# Altium PCB mchf_pro_ui.PcbDoc (part 6 of 7)
Units mil, origin at the board's own origin, x right, y up, seen from the top; angles counter-clockwise.
Board outline 7877.73 x 5661.04 mil, 2 copper layers (Top Layer, Bottom Layer); 345 components, 345 nets, 1318 pads, 783 vias.
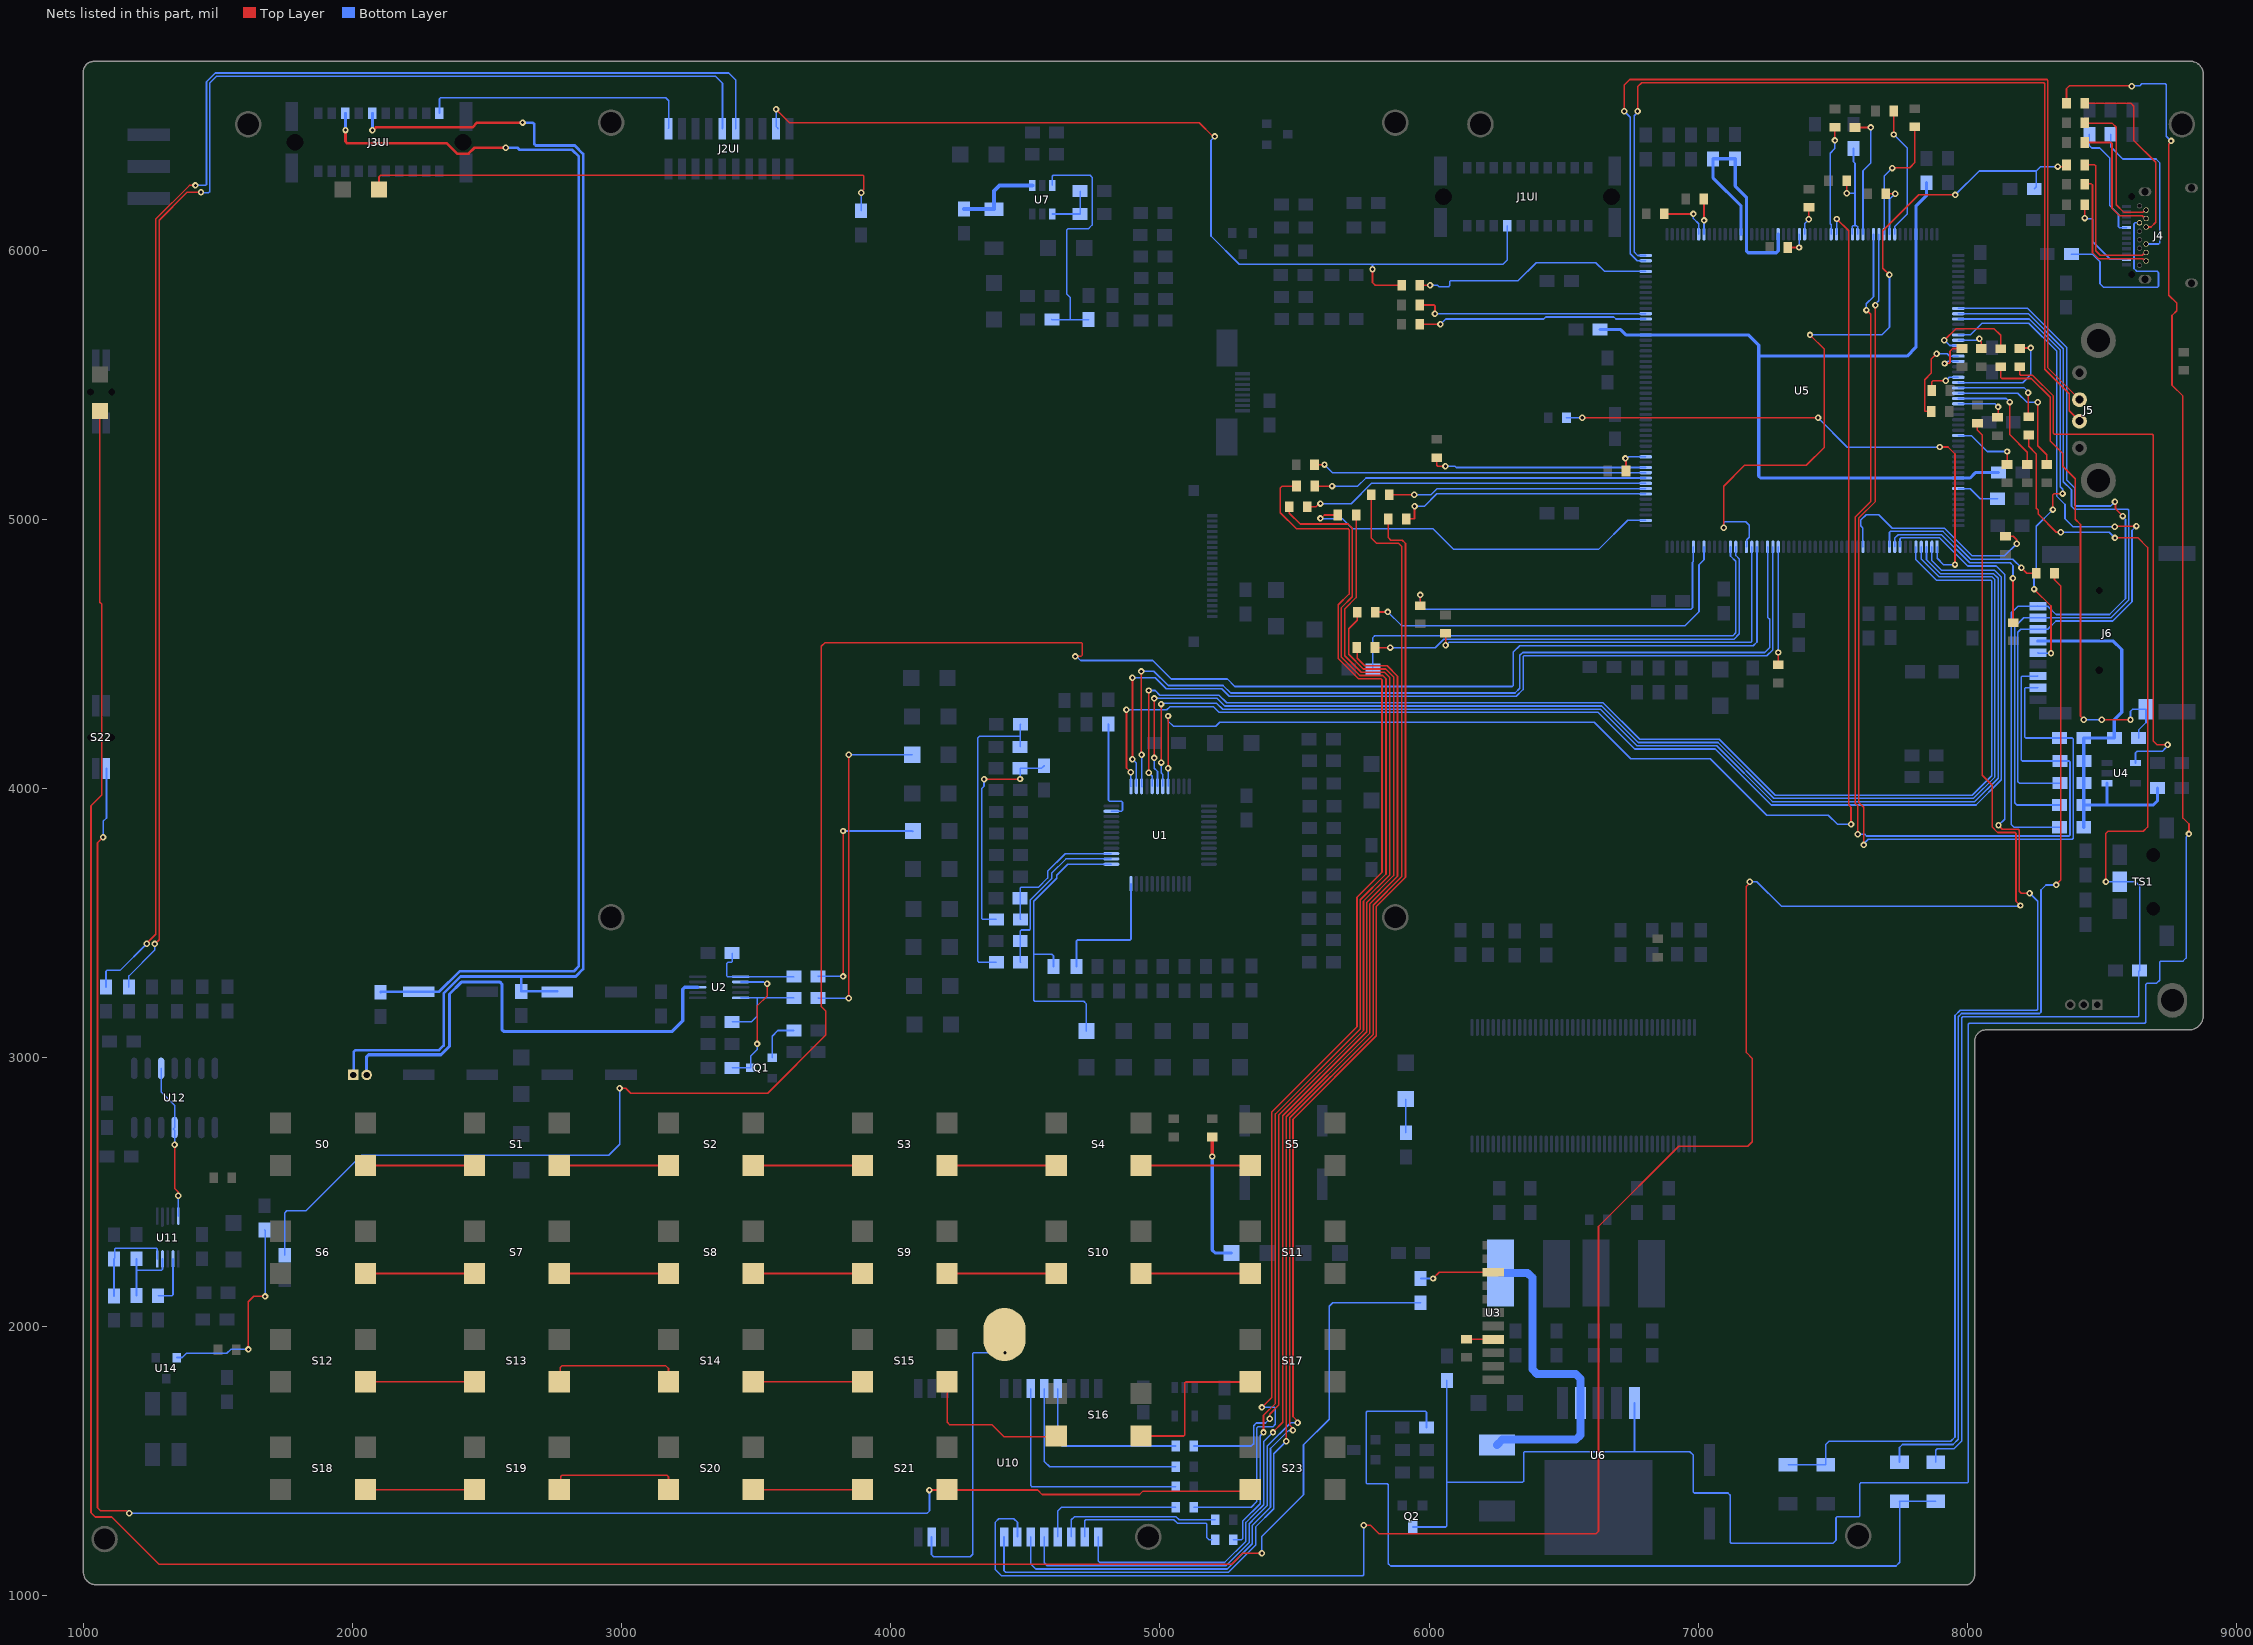
[diagram p5: the nets of this part, all layers, seen from the top]

## Via types
v1: diameter 24, hole 12, Top Layer to Bottom Layer, 779 vias
v2: diameter 30, hole 15, Top Layer to Bottom Layer, 4 vias

## Nets (pads, with @x,y where several pads share a name; then routed paths per layer and width w, separated by ;. In a path a pad name is that pad's centre, name@x,y a point inside that pad or via, vN(x,y) a via of type N, cw(c..) or ccw(c..) an arc to the next point about the centre after c; other vN are vias at no path point) (continued)
NetCC24_2: CC24.2 U1.24 | length 505.9
  Bottom Layer w6: CC24.2@4690.02,3338.63 4690.02,3433.79 4693.54,3437.3 4888.99,3437.3 4892.5,3440.82 U1.24@4892.5,3646.13
NetCC25_1: CC25.1 R2.2 U1.25 | length 1138.8
  Bottom Layer w6: R2.2@4604.6,3338.68 4604.6,3378.41 4598.2,3384.8 4530.85,3384.8 ; CC25.1@4726.82,3099.3 4726.82,3199.9 4717.08,3209.64 4534.36,3209.64 4530.85,3213.15 4530.85,3384.8 ; U1.25@4819.67,3718.97 4657.16,3718.97 4616.43,3678.23 4616.43,3667.31 4530.85,3581.73 4530.85,3384.8
NetCC26_1: CC26.1 CC26a.2 U1.26 | length 642.1
  Bottom Layer w6: CC26a.2@4482.19,3354.58 4480.63,3356.13 CC26.1@4480.63,3433.42 4480.63,3470.89 4484.15,3474.41 4515.17,3474.41 4518.69,3477.92 4518.69,3586.54 4550.01,3617.86 4598.39,3666.25 4598.39,3686.04 4651,3738.65 U1.26@4819.67,3738.65
NetCC26a_1: CC26a.1 R3.2 R5.1 | length 1144
  Bottom Layer w6: CC26a.1@4392.19,3354.58 4327.26,3354.58 4323.75,3358.1 4323.75,4188.72 4329.44,4194.41 4480.47,4194.41 ; R5.1@4480.47,4155.12 4480.47,4194.41 ; R3.2@4481.87,4238.9 4480.47,4237.51 4480.47,4194.41
NetCC27_1: CC27.1 CC27a.2 U1.27 | length 524.2
  Bottom Layer w6: CC27a.2@4482.19,3513.88 4480.47,3515.59 CC27.1@4480.47,3592.46 4480.47,3629.91 4483.99,3633.43 4548.6,3633.43 4582.57,3667.4 4582.57,3693.04 4647.86,3758.34 4654.88,3758.34 U1.27@4819.67,3758.34
NetCC27a_1: CC27a.1 R4.2 R6.1 | length 844.7
  Top Layer w6: v1(4346.36,4034.88) 4346.7,4035.21 4480.14,4035.21 v1(4480.47,4035.55)
  Bottom Layer w6: v1(4346.36,4034.88) 4346.36,4008.99 4338.49,4001.12 4338.49,3517.39 4342.01,3513.88 CC27a.1@4392.19,3513.88 ; v1(4480.47,4035.55) R6.1@4480.47,4075.45 4560.18,4075.45 R4.2@4569.89,4085.16 R4.2@4570.64,4084.41
NetCP89_2: CP89.2 CP152.2 CP199.2 U5.89 U5.152 U5.199 | length 3226.9
  Bottom Layer w12: CP89.2@6635.47,5705.29 6711.58,5705.29 6731.26,5685.61 U5.89@6805.08,5685.61 7186.13,5685.61 7224.55,5647.19 7224.55,5606.87 ; CP152.2@7847.95,6250.96 7847.95,6202.8 7809.02,6163.88 U5.152@7809.02,6059.62 7809.02,5639.77 7776.12,5606.87 7224.55,5606.87 ; CP199.2@8115.66,5174.02 8029.94,5174.02 8010.04,5154.11 U5.199@7966.5,5154.11 7231.58,5154.11 7224.55,5161.14 7224.55,5606.87
NetCP119_1: CP119.1 CP119E.1 U5.119 U5.120 U5.126 | length 949
  Bottom Layer w12: U5.119@7159.42,6059.62 7159.42,6164.55 7055.41,6268.56 CP119E.1@7055.41,6339.04 7056.26,6339.89 CP119.1@7137.28,6339.89 7137.28,6238.7 7179.1,6196.88 U5.120@7179.1,6059.62 7179.1,5998.24 7186.13,5991.21 7290.18,5991.21 7297.21,5998.24 U5.126@7297.21,6059.62
NetCP140_1: CP140.1 M48.2 U5.140 U5.141 | length 445.7
  Top Layer w6: v1(7551.56,6211.95) M48.2@7551.56,6258.47
  Bottom Layer w6: v1(7551.56,6211.95) 7582.42,6211.95 ; U5.140@7572.8,6059.62 7572.8,6088.27 7576.32,6091.78 7582.42,6091.78 ; CP140.1@7577.08,6378.31 7577.08,6328.6 7582.42,6323.26 7582.42,6211.95 ; U5.141@7592.49,6059.62 7592.49,6087.82 7588.52,6091.78 7582.42,6091.78 ; 7582.42,6091.78 7582.42,6211.95
NetD6_2: D6.2 D7.2 U5.8 | length 4805.5
  Top Layer w6: v1(8115.77,3863.36) 8130.12,3849.01 8189.44,3849.01 8192.96,3845.49 8192.96,3618.66 8200.52,3611.09 v1(8231.33,3611.09)
  Bottom Layer w6: D6.2@7334.14,1487.06 D7.2@7473.63,1487.06 7473.63,1562.77 7485.66,1574.8 7938.3,1574.8 7954.05,1590.55 7954.05,3141.52 7954.05,3157.17 7973.2,3176.32 8257.99,3176.32 8261.5,3179.84 8261.5,3581.87 8232.28,3611.09 v1(8231.33,3611.09) ; U5.8@7749.97,4898.21 7749.97,4927.98 7753.48,4931.5 7896.73,4931.5 8001.29,4826.93 8107.02,4826.93 8138.53,4795.42 8138.53,3886.12 v1(8115.77,3863.36)
NetD8_2: D8.2 L1.1 U6.2 | length 1193.3
  Bottom Layer w30: D8.2@6252.37,1561.18 6271.85,1580.66 6544.9,1580.66 6562.47,1598.24 6562.47,1807.23 6544.9,1824.8 6401.44,1824.8 6383.86,1842.38 6383.86,2182.67 6366.29,2200.25 L1.1@6265.8,2200.25
NetD9_2: D9.2 D10.2 R37.1 | length 3196.6
  Bottom Layer w6: R37.1@5990.57,1625.29 5990.57,1682.45 5987.06,1685.96 5770.18,1685.96 5766.67,1682.45 5766.67,1420.02 5770.18,1416.51 5844.64,1416.51 5848.16,1412.99 5848.16,1119.98 5856.92,1111.22 7735.24,1111.22 7749.02,1125 7749.02,1351.12 D10.2@7747.78,1352.36 D9.2@7882.49,1352.36
NetD11_1: D11.1 RFC6.2 U7.1 | length 329.6
  Bottom Layer w15: RFC6.2@4271.65,6153.41 D11.1@4383.71,6153.41 4383.71,6220.45 4404.53,6241.27 U7.1@4525.59,6241.27
NetJ4_A5: J4.A5 R22.2 | length 436.3
  Bottom Layer w6: R22.2@8453.58,6430.81 8453.58,6388.46 8462.04,6380 8492.48,6380 8529.38,6343.1 8529.38,6166.54 8561.79,6134.13 8561.79,6087.96 8565.31,6084.45 J4.A5@8591.18,6084.45
NetJ4_A11: J4.A11 M3.1 | length 316.7
  Top Layer w6: v1(8436.12,6119.95) M3.1@8436.11,6169.58
  Bottom Layer w6: v1(8436.12,6119.95) 8438.15,6117.92 8462.04,6117.92 8465.55,6114.41 8465.55,6031.88 8531.09,5966.34 J4.A11@8591.18,5966.34
NetJ4_B2: J4.B2 M3e.2 | length 492.3
  Top Layer w6: M3e.2@8437.61,6246.77 8461.11,6246.77 8464.9,6242.98 8464.9,5991.94 8487.7,5969.13 8651.81,5969.13 8660.51,5960.44 J4.B2@8664.21,5960.44
NetJ4_B3: J4.B3 M3d.1 | length 556.7
  Top Layer w6: M3d.1@8436.11,6317.26 8473.39,6317.26 8476.9,6313.75 8476.9,5998.17 8493.94,5981.13 8649.71,5981.13 8660.51,5991.94 J4.B3@8664.21,5991.94
NetJ4_B5: J4.B5 R23.1 | length 604.7
  Bottom Layer w6: R23.1@8532.42,6431.56 8532.42,6384.44 8577.67,6339.19 8701.12,6339.19 8715.55,6324.75 8715.55,6028.52 8710.47,6023.43 J4.B5@8664.21,6023.43
NetJ4_B8: J4.B8 M3h.2 | length 693.8
  Top Layer w6: M3h.2@8437.61,6546.25 8607.89,6546.25 8618.83,6535.31 8618.83,6408.2 8700.04,6326.99 8700.04,6104.09 8682.37,6086.43 J4.B8@8664.21,6086.43
NetJ4_B9: J4.B9 R23a.1 | length 759.1
  Bottom Layer w6: R23a.1@8386.96,5986.02 8463.74,5986.02 8492.74,5957.03 8492.74,5876.13 8505.47,5863.39 8706.95,5863.39 8710.47,5866.91 8710.47,5917.07 8705.71,5921.83 8629.88,5921.83 8619.21,5932.49 8619.21,6098.66 8622.73,6102.17 J4.B9@8639.72,6102.17
NetJ4_B10: J4.B10 M3a.1 | length 486.3
  Top Layer w6: M3a.1@8436.11,6400.77 8533.89,6400.77 8537.4,6397.26 8537.4,6156.51 8565.17,6128.75 8649.68,6128.75 8660.51,6117.92 J4.B10@8664.21,6117.92
NetJ4_B11: J4.B11 M3b.1 | length 538.2
  Top Layer w6: M3b.1@8436.11,6474.41 8437.86,6472.66 8537.4,6472.66 8553.15,6456.91 8553.15,6169.58 8581.98,6140.75 8651.83,6140.75 8660.49,6149.41 J4.B11@8664.19,6149.41
NetLD1_1: LD1.1 R19.2 | length 9927.9
  Top Layer w6: LD1.1@1061.02,5403.54 1061.02,4692.75 1068.84,4684.93 1068.84,3976.54 1028.2,3935.9 1028.2,1309.11 1044.03,1293.28 1105.61,1293.28 1280.83,1118.06 5266.68,1118.06 5307.11,1158.49 v1(5378.94,1158.49)
  Bottom Layer w6: v1(5378.94,1158.49) 5378.94,1221.46 5533.46,1375.98 5533.46,1561.59 5628.94,1657.06 5628.94,2076.65 5642,2089.71 R19.2@5968.58,2089.71
NetLD2_1: LD2.1 R30.2 | length 1984.3
  Top Layer w6: LD2.1@2098.43,6226.38 2098.43,6273.22 2104.55,6279.34 3895.62,6279.34 3899.14,6275.82 3899.14,6226.1 3889.76,6216.72 v1(3889.76,6213.58)
  Bottom Layer w6: R30.2@3889.76,6146.96 v1(3889.76,6213.58)
NetLD6_1: LD6.1 R35a.1 | length 125
  Bottom Layer w6: R35a.1@5913.61,2721.32 LD6.1@5913.61,2846.33
"NetLora Ant_1": "LORA ANT.1" U10.21 | length 1092.1
  Bottom Layer w6: U10.21@4151.38,1219.49 4151.38,1154.11 4159.82,1145.67 4294.94,1145.67 4304.13,1154.86 4304.13,1900.03 4307.65,1903.54 v1(4424.21,1903.54)
NetM2_2: M2.2 R19a.1 | length 496.3
  Top Layer w12: v1(5194.22,2632.93) 5194.22,2704.98 M2.2@5194.67,2705.42
  Bottom Layer w12: v1(5194.22,2632.93) 5194.22,2285.05 5204.91,2274.36 R19a.1@5265.53,2274.36
NetM2a_2: M2a.2 U3.8 | length 99.8
  Top Layer w6: M2a.2@6138.78,1954.03 6237.31,1954.03 U3.8@6238.19,1953.15
NetM51a_2: M51a.2 U10.6 | length 901.1
  Bottom Layer w6: U10.6@4520.67,1770.67 4520.67,1409.12 4524.18,1405.61 M51a.2@5058.77,1405.61
NetM51b_2: M51b.2 U10.7 | length 767.2
  Bottom Layer w6: U10.7@4570.67,1770.67 4570.67,1499.83 4590.67,1479.83 M51b.2@5058.77,1479.83
NetM51c_1: M51c.1 U10.13 | length 593.3
  Bottom Layer w6: U10.13@4720.67,1219.49 4720.67,1279.31 4724.18,1282.82 5051.86,1282.82 5063.88,1270.8 5169.96,1270.8 5173.47,1267.29 5173.47,1217.66 5182.42,1208.71 M51c.1@5192.91,1208.71
NetM51d_1: M51d.1 U10.8 | length 642.6
  Bottom Layer w6: U10.8@4620.67,1770.67 4620.67,1572.52 4636.1,1557.09 M51d.1@5058.77,1557.09
NetM51e_1: M51e.1 U10.15 | length 540.4
  Bottom Layer w6: U10.15@4620.67,1219.49 4620.67,1316.01 4634.62,1329.96 M51e.1@5058.77,1329.96
NetM51f_1: M51f.1 U10.14 | length 607.5
  Bottom Layer w6: U10.14@4670.67,1219.49 4670.67,1282.82 4682.67,1294.82 5059.79,1294.82 5071.79,1282.82 M51f.1@5204.91,1282.82
NetM60_2: M60.2 U14.2 | length 774.3
  Top Layer w6: v1(1612.99,1916.14) 1612.99,2093.31 1632.87,2113.19 v1(1675.2,2113.19)
  Bottom Layer w6: U14.2@1346.4,1885.57 1346.83,1885.99 1367.64,1885.99 1383.16,1901.51 1532.46,1901.51 1547.09,1916.14 v1(1612.99,1916.14) ; M60.2@1673.23,2359.8 1675.2,2357.83 v1(1675.2,2113.19)
NetP0_2: P0.2 U2.8 | length 1839
  Bottom Layer w12: P0.2@2052.16,2936.03 2052.16,3003.8 2059.19,3010.83 2328.69,3010.83 2360.24,3042.37 2360.24,3236.67 2404.48,3280.91 2548.06,3280.91 2555.09,3273.88 2555.09,3104.62 2562.12,3097.59 3188.27,3097.59 3227.29,3136.61 3227.29,3254.78 3234.32,3261.81 U2.8@3282.48,3261.81
NetQ1_1: Q1.1 R8.1 | length 168.5
  Bottom Layer w6: Q1.1@3559.05,3000.74 3559.05,3079.72 3580.24,3100.91 R8.1@3639.76,3100.91
NetQ1_3: Q1.3 R9.2 U2.2 | length 508.5
  Top Layer w6: v1(3503.18,3051.39) 3503.18,3191.83 3540.42,3229.06 3540.42,3274.54 v1(3540.35,3274.61)
  Bottom Layer w6: R9.2@3410.43,2962.15 Q1.3@3480.31,2962.15 3480.31,3006.89 3503.18,3029.76 v1(3503.18,3051.39) ; U2.2@3441.93,3281.5 3528.59,3281.5 3535.48,3274.61 v1(3540.35,3274.61)
NetR1_2: R1.2 U1.35 | length 412.1
  Bottom Layer w6: R1.2@4807.94,4240.3 4808.91,4239.33 4808.91,3956.42 4812.43,3952.91 4857.47,3952.91 4860.98,3949.39 4860.98,3919.33 4857.47,3915.82 U1.35@4819.67,3915.82
NetR11_1: R11.1 R13.2 U2.1 | length 350.3
  Bottom Layer w6: R13.2@3410.43,3388.47 3410.43,3357.75 3406.92,3354.23 3395.06,3354.23 3389.76,3348.93 3389.76,3305.44 3394.03,3301.18 U2.1@3441.93,3301.18 3503.18,3301.18 R11.1@3639.76,3301.18
NetR12_1: R12.1 R14.2 U2.5 | length 367.5
  Bottom Layer w6: R14.2@3410.43,3133.22 3482.17,3133.22 3503.18,3154.24 3503.18,3222.44 ; U2.5@3441.93,3222.44 3503.18,3222.44 ; R12.1@3639.76,3222.44 3503.18,3222.44
NetR19_1: R19.1 U3.3 | length 279.4
  Top Layer w6: v1(6014.76,2179.71) 6038.2,2203.15 U3.3@6238.19,2203.15 U3.3@6238.19,2203.15
  Bottom Layer w6: R19.1@5968.58,2179.71 v1(6014.76,2179.71)
NetR33_2: R33.2 U5.201 | length 161.3
  Bottom Layer w6: U5.201@7966.5,5114.74 7967.16,5114.08 8010.69,5114.08 8047.77,5077 R33.2@8112.16,5077
NetR42_2: R42.2 R43.2 U7.4 | length 188
  Bottom Layer w6: U7.4@4600.39,6134.97 R42.2@4703.31,6134.97 R43.2@4703.31,6220.11
NetR44_2: R44.2 R45.1 U7.3 | length 939.5
  Bottom Layer w6: R45.1@4598.44,5743.24 4599.07,5742.62 4666.73,5742.62 ; U7.3@4600.39,6241.27 4600.39,6275.15 4603.91,6278.67 4741.22,6278.67 4747.89,6272 4747.89,6093.76 4733.59,6079.46 4657.82,6079.46 4654.3,6075.94 4654.3,5837.07 4666.73,5824.64 4666.73,5742.62 ; R44.2@4734.39,5742.62 4666.73,5742.62
NetR50_1: R50.1 U11.2 | length 189.7
  Bottom Layer w6: R50.1@1277.8,2115.75 1329.58,2115.75 1333.09,2119.26 U11.2@1333.09,2252.19
NetR51_1: R51.1 R53.1 U11.4 | length 272.7
  Bottom Layer w6: R51.1@1197.33,2116.6 1197.33,2210.58 ; R53.1@1197.55,2253.23 1197.33,2253 1197.33,2210.58 ; U11.4@1293.72,2252.19 1293.72,2214.1 1290.21,2210.58 1197.33,2210.58
NetR52_1: R52.1 R54.1 U11.5 | length 371.8
  Bottom Layer w6: R52.1@1113.64,2114.6 1113.86,2114.82 R54.1@1113.86,2252.17 1115.86,2254.17 1115.86,2288.31 1119.38,2291.82 1270.52,2291.82 1274.04,2288.31 U11.5@1274.04,2252.19
NetR59_1: R59.1 U5.35 | length 8155.2
  Top Layer w6: v1(2992.13,2886.81) 3014.76,2886.81 3033.28,2868.3 3542.76,2868.3 3758.79,3084.33 3758.79,3173.3 3741.76,3190.32 3741.76,4528.46 3755.49,4542.19 4708.47,4542.19 4711.99,4538.67 4711.99,4496.71 4706.46,4491.19 v1(4685.09,4491.19)
  Bottom Layer w6: R59.1@1748.03,2266.18 1748.03,2423.23 1755.91,2431.1 1827.17,2431.1 2033.56,2637.49 2952.22,2637.49 2993.29,2678.55 2993.29,2885.65 v1(2992.13,2886.81) ; v1(4685.09,4491.19) 4689.96,4491.19 4705.15,4476 4973.49,4476 5042.47,4407.02 5250.7,4407.02 5278.47,4379.25 6309.73,4379.25 6313.24,4382.76 6313.24,4507.64 6336.69,4531.09 7204.85,4531.09 7218.47,4544.71 U5.35@7218.47,4898.21
NetS0_4: S0.4 S1.2 | length 405.7
  Top Layer w6: S0.4@2047.64,2599.37 S1.2@2453.35,2599.37
NetS1_4: S1.4 S2.2 | length 405.5
  Top Layer w6: S1.4@2768.31,2599.37 S2.2@3173.82,2599.37
NetS2_4: S2.4 S3.2 | length 405.5
  Top Layer w6: S2.4@3488.78,2599.37 S3.2@3894.29,2599.37
NetS3_4: S3.4 S4.2 | length 405.5
  Top Layer w6: S3.4@4209.25,2599.37 S4.2@4614.76,2599.37
NetS4_4: S4.4 S5.2 | length 405.5
  Top Layer w6: S4.4@4929.72,2599.37 S5.2@5335.24,2599.37
NetS6_4: S6.4 S7.2 | length 405.7
  Top Layer w6: S6.4@2047.64,2198.03 S7.2@2453.35,2198.03
NetS7_4: S7.4 S8.2 | length 405.5
  Top Layer w6: S7.4@2768.31,2198.03 S8.2@3173.82,2198.03
NetS8_4: S8.4 S9.2 | length 405.5
  Top Layer w6: S8.4@3488.78,2198.03 S9.2@3894.29,2198.03
NetS9_4: S9.4 S10.2 | length 405.5
  Top Layer w6: S9.4@4209.25,2198.03 S10.2@4614.76,2198.03
NetS10_4: S10.4 S11.2 | length 405.5
  Top Layer w6: S10.4@4929.72,2198.03 S11.2@5335.24,2198.03
NetS12_4: S12.4 S13.2 | length 405.7
  Top Layer w6: S12.4@2047.64,1796.06 S13.2@2453.35,1796.06
NetS13_4: S13.4 S14.2 | length 512.8
  Top Layer w6: S13.4@2768.31,1796.06 2772,1799.76 2772,1849 2779,1856 3163,1856 3173.82,1845.18 S14.2@3173.82,1796.06
NetS14_4: S14.4 S15.2 | length 405.5
  Top Layer w6: S14.4@3488.78,1796.06 S15.2@3894.29,1796.06
NetS15_4: S15.4 S16.2 | length 569.8
  Top Layer w6: S15.4@4209.25,1796.06 4209.25,1645.75 4218.09,1636.91 4375.09,1636.91 4420.46,1591.54 S16.2@4606.3,1591.54
NetS16_4: S16.4 S17.2 | length 602.5
  Top Layer w6: S16.4@4929.72,1594.49 5088.45,1594.49 5091.96,1598 5091.96,1791.76 5095.48,1795.28 5334.45,1795.28 S17.2@5335.24,1796.06
NetS18_4: S18.4 S19.2 | length 405.7
  Top Layer w6: S18.4@2047.64,1395.08 S19.2@2453.35,1395.08
NetS19_4: S19.4 S20.2 | length 503.1
  Top Layer w6: S19.4@2768.31,1395.08 2774,1400.77 2774,1444.49 2777.51,1448 3169,1448 3173.82,1443.18 S20.2@3173.82,1395.08
NetS20_4: S20.4 S21.2 | length 405.5
  Top Layer w6: S20.4@3488.78,1395.08 S21.2@3894.29,1395.08
NetS21_4: S21.4 S22.4 S23.2 | length 7149.7
  Top Layer w6: v1(1073.19,3819.35) 1052.2,3798.36 1052.2,1327.36 1062.24,1317.32 1160.21,1317.32 v1(1170.37,1307.16) ; v1(4143.7,1393.7) 4207.87,1393.7 S21.4@4209.25,1395.08 4210.57,1393.76 4545.47,1393.76 4562.13,1377.1 4924.17,1377.1 4936.83,1389.76 5329.92,1389.76 S23.2@5335.24,1395.08
  Bottom Layer w6: v1(1073.19,3819.35) 1073.19,3878.4 1085.63,3890.84 S22.4@1085.63,4074.96 ; v1(1170.37,1307.16) 4134.84,1307.16 4143.7,1316.01 v1(4143.7,1393.7)
NetU11_10: U11.10 U12.3 U12.11 | length 579.8
  Top Layer w6: v1(1338.72,2676.18) 1338.72,2514.48 1352.37,2500.83 v1(1352.37,2486.95)
  Bottom Layer w6: U12.3@1288.72,2960.46 1288.72,2872.98 1338.72,2822.98 U12.11@1338.72,2740.46 1333.31,2735.05 1338.72,2729.65 v1(1338.72,2676.18) ; v1(1352.37,2486.95) 1352.78,2486.55 U11.10@1352.78,2411.64
NRST: M3d.2 R32.2 U5.37 | length 2768.4
  Top Layer w6: v1(7094.83,4968.74) 7094.83,5123.44 7172.32,5200.93 7401.42,5200.93 7468.95,5268.46 7468.95,5631.98 v1(7415.32,5685.61) ; v1(7710.6,5909.18) 7686.02,5933.75 7686.02,6073.08 7818.96,6206.01 v1(7955.11,6206.01) ; v1(8335.63,6310.97) 8362.31,6310.97 M3d.2@8368.61,6317.26
  Bottom Layer w6: v1(7094.83,4968.74) 7094.83,4987.53 7098.34,4991.04 7176.88,4991.04 7189.9,4978.03 7189.9,4933.86 7180.07,4924.03 7180.07,4899.18 U5.37@7179.1,4898.21 ; v1(7415.32,5685.61) 7681.68,5685.61 7710.6,5714.52 v1(7710.6,5909.18) v1@7710.6,5914.95 ; v1(7955.11,6206.01) 8043.83,6294.73 8255.95,6294.73 ; R32.2@8248.41,6228.16 8255.95,6235.71 8255.95,6294.73 ; v1(8335.63,6310.97) 8272.19,6310.97 8255.95,6294.73
OTG_HS_DM: J5.3 U5.103 | length 3523.8
  Top Layer w6: v1(6725.39,6516.89) 6725.39,6614.55 6745.69,6634.85 8295.82,6634.85 8299.34,6631.33 8299.34,5563.1 8416.94,5445.5 J5.3@8416.94,5445.05
  Bottom Layer w6: v1(6725.39,6516.89) 6747.65,6494.63 6747.65,5986.76 6773.21,5961.2 U5.103@6805.08,5961.2
OTG_HS_DP: J5.2 U5.104 | length 3495.8
  Top Layer w6: v1(6774.83,6516.89) 6774.83,6607.38 6790.29,6622.85 8283.82,6622.85 8287.34,6619.33 8287.34,5558.13 8378.65,5466.83 8378.65,5403.35 J5.2@8416.94,5365.05
  Bottom Layer w6: v1(6774.83,6516.89) 6774.83,6513.04 6761.91,6500.12 6761.91,5993.8 6774.83,5980.88 U5.104@6805.08,5980.88
PA0: M16.2 U5.45 | length 1494.1
  Top Layer w6: M16.2@5800.48,4655.51 5801.25,4656.28 v1(5846.87,4656.28)
  Bottom Layer w6: v1(5846.87,4656.28) 5897.5,4605.65 6951.86,4605.65 7003,4656.79 7003,4831.26 7021.62,4849.88 U5.45@7021.62,4898.21
PA2: M17.2 U5.47 | length 1319.5
  Top Layer w6: M17.2@5966.54,4680.25 M17.2@5967.52,4679.26 ; M17.2@5967.52,4691.26 v1(5967.52,4719.49)
  Bottom Layer w6: v1(5967.52,4719.49) 5967.52,4675.47 5977.18,4665.81 6973.2,4665.81 6979,4671.61 6979,4841.2 6982.25,4844.45 U5.47@6982.25,4898.21
PA3: M18.2 U5.54 | length 1370.3
  Top Layer w6: v1(5596.46,5003.92) 5597.88,5005.34 5600,5005.34 5611.39,5016.73 M18.2@5661.37,5016.73
  Bottom Layer w6: v1(5596.46,5003.92) 5598.41,5001.97 5679.43,5001.97 5716.51,4964.89 6015.3,4964.89 6090.37,4889.82 6631.05,4889.82 6737.86,4996.63 U5.54@6805.08,4996.63
PA6: M19.2 U5.59 | length 951.8
  Top Layer w6: M19.2@5927.35,5001.97 5944.88,5001.97 5946.03,5003.12 v1(5946.03,5049.31) 5953.06,5049.31 v1@5954.05,5048.31
  Bottom Layer w6: v1(5946.03,5049.31) 5983.31,5049.31 6029.05,5095.06 U5.59@6805.08,5095.06
PA7: M20.2 U5.60 | length 970.8
  Top Layer w6: M20.2@5852.6,5091.87 v1(5944.88,5091.87) v1@5953.75,5091.87
  Bottom Layer w6: v1(5944.88,5091.87) 6007.02,5091.87 6029.89,5114.74 U5.60@6805.08,5114.74
PA8: M39.2 U5.146 | length 483.6
  Top Layer w6: v1(7720.61,6305.65) 7722.22,6307.26 7786.28,6307.26 7804.93,6325.91 M39.2@7804.93,6458.5
  Bottom Layer w6: U5.146@7690.91,6059.62 7690.91,6275.95 v1(7720.61,6305.65)
PA9: M44.2 U5.147 | length 194.9
  Top Layer w6: M44.2@7696.77,6210.3 M44.2@7696.65,6210.41 7696.74,6210.5 v1(7731.76,6210.5)
  Bottom Layer w6: U5.147@7710.6,6059.62 7710.6,6189.33 v1(7731.76,6210.5)
PA10: M38.2 U5.148 | length 497.3
  Top Layer w6: M38.2@7726.33,6517.36 7726.49,6517.2 v1(7726.49,6430.29)
  Bottom Layer w6: v1(7726.49,6430.29) 7776.12,6380.66 7776.12,6133.95 7730.28,6088.11 U5.148@7730.28,6059.62
PB0: M26.2 U5.63 | length 1243.1
  Top Layer w6: M26.2@5574.39,5203.66 v1(5611.39,5203.66)
  Bottom Layer w6: v1(5611.39,5203.66) 5641.26,5173.8 U5.63@6805.08,5173.8
PB1: M27.2 U5.64 | length 796.8
  Top Layer w6: M27.2@6028.52,5217.76 6028.52,5201.34 6032.04,5197.82 v1(6060.93,5197.82)
  Bottom Layer w6: v1(6060.93,5197.82) 6096.3,5197.82 6101.29,5192.83 6804.44,5192.83 U5.64@6805.08,5193.48
PB5: M14.2 U5.191 | length 254.2
  Top Layer w6: M14.2@8147.86,5204.12 v1(8147.86,5252.54)
  Bottom Layer w6: U5.191@7966.5,5311.59 7967.02,5311.08 8015.7,5311.08 8074.23,5252.54 v1(8147.86,5252.54)
PB12: M25.2 U5.101 | length 901.3
  Top Layer w6: M25.2@5966.06,5869.78 v1(6003.77,5869.78)
  Bottom Layer w6: v1(6003.77,5869.78) 6031.55,5869.78 6037.03,5864.3 6072.78,5864.3 6076.29,5867.81 6076.29,5883.72 6079.81,5887.23 6330.68,5887.23 6397.71,5954.26 6619.36,5954.26 6651.79,5921.83 U5.101@6805.08,5921.83
PC1: M21.2 U5.39 | length 1703.6
  Top Layer w6: M21.2@5799.18,4523.78 v1(5855.46,4523.78)
  Bottom Layer w6: v1(5855.46,4523.78) 6022.73,4523.78 6054.04,4555.09 7133.12,4555.09 7152.82,4574.8 7152.82,4852.91 7140.06,4865.67 7140.06,4897.88 U5.39@7139.73,4898.21
PC2: R31.1 U5.40 | length 1802.5
  Bottom Layer w6: R31.1@5791.34,4441.93 5791.34,4561.07 5798.13,4567.85 7128.91,4567.85 7139.73,4578.67 7139.73,4844.45 7120.05,4864.13 U5.40@7120.05,4898.21
PC4: M22.2 U5.61 | length 1299.5
  Top Layer w6: M22.2@5551.17,5051.15 M22.2@5547.26,5047.24 5580.02,5047.24 5591.59,5058.81 v1(5596.46,5058.81)
  Bottom Layer w6: v1(5596.46,5058.81) 5710.8,5058.81 5786.42,5134.43 U5.61@6805.08,5134.43
PC5: M23.2 U5.62 | length 1242.8
  Top Layer w6: M23.2@5574.76,5124.02 v1(5639.76,5124.02)
  Bottom Layer w6: v1(5639.76,5124.02) 5735.33,5124.02 5765.43,5154.11 6069.85,5154.11 U5.62@6805.08,5154.11
PC6: M34.2 U5.142 | length 467
  Top Layer w6: M34.2@7582.68,6456.41 v1(7640.96,6456.41)
  Bottom Layer w6: U5.142@7612.17,6059.62 7612.17,6295.88 7640.96,6324.67 v1(7640.96,6456.41)
PC13: M6.2 U5.10 | length 665.5
  Top Layer w6: v1(8200.96,4820.2) 8220.96,4800.2 M6.2@8256.55,4800.2
  Bottom Layer w6: U5.10@7710.6,4898.21 7710.6,4951.98 7714.11,4955.5 7909.92,4955.5 8012.9,4852.51 8168.64,4852.51 v1(8200.96,4820.2)
PD3: M13.2 U5.173 | length 107.3
  Top Layer w6: v1(8045.11,5671.82) 8045.11,5666.95 8051.83,5660.23 M13.2@8051.83,5635.1
  Bottom Layer w6: U5.173@7966.5,5665.92 8034.35,5665.92
PD4: M40.2 U5.174 | length 347.2
  Top Layer w6: v1(7914.58,5665.92) 7957.58,5708.92 8099.34,5708.92 8123.86,5684.4 M40.2@8123.86,5634.49
  Bottom Layer w6: v1(7914.58,5665.92) 7934.27,5646.24 U5.174@7966.5,5646.24
PD6: M12.2 U5.176 | length 340.6
  Top Layer w6: M12.2@7865.46,5401.57 7841.47,5401.57 7841.47,5518.96 7865.26,5542.75 7865.26,5594.99 v1(7885.84,5615.57)
  Bottom Layer w6: v1(7885.84,5615.57) 7925.18,5615.57 7933.88,5606.87 U5.176@7966.5,5606.87
PD7: M35.2 U5.177 | length 167.3
  Top Layer w6: v1(7915.41,5579.4) 7915.93,5579.93 7932.58,5579.93 7935.58,5582.92 7935.58,5625.18 7945.49,5635.1 M35.2@7980.54,5635.1
  Bottom Layer w6: v1(7915.41,5579.4) 7920.28,5579.4 7928.06,5587.18 U5.177@7966.5,5587.18
PD12: M45.2 U5.111 | length 191.7
  Top Layer w6: M45.2@6874.46,6135.85 6875.3,6135.01 v1(6982.25,6135.01)
  Bottom Layer w6: v1(6982.25,6135.01) 6982.25,6118.27 7001.93,6098.58 U5.111@7001.93,6059.62
PD13: M47.2 U5.112 | length 130.9
  Top Layer w6: M47.2@7021.3,6190.41 7021.62,6190.09 v1(7021.62,6111.27)
  Bottom Layer w6: U5.112@7021.62,6059.62 v1(7021.62,6111.27)
PE2: M46.2 U5.1 | length 2028.8
  Top Layer w6: v1(6568.95,5377.78) v1(7445.22,5377.78) ; v1(7897.28,5269.15) 7928.52,5269.15 7954.16,5243.51 v1(7954.16,4832.17)
  Bottom Layer w6: M46.2@6510.76,5377.78 v1(6568.95,5377.78) ; v1(7445.22,5377.78) 7554.29,5268.71 v1@7896.76,5268.71 ; U5.1@7887.76,4898.21 7887.76,4855.54 7911.14,4832.17 v1(7954.16,4832.17)
PF7: M43.2 U5.31 | length 438.3
  Top Layer w6: M43.2@7297.21,4459.9 v1(7297.21,4505.59)
  Bottom Layer w6: v1(7297.21,4505.59) U5.31@7297.21,4898.21
PG2: M32a.2 U5.130 | length 89.4
  Top Layer w6: M32a.2@7335.14,6010.38 v1(7374.75,6010.38)
  Bottom Layer w6: v1(7374.75,6010.38) 7375.35,6010.98 7375.35,6059.02 U5.130@7375.95,6059.62
PG3: M32.2 U5.131 | length 106.4
  Top Layer w6: v1(7411.01,6115.69) 7411.01,6146.45 7411.42,6146.86 M32.2@7411.42,6159.45
  Bottom Layer w6: U5.131@7395.64,6059.62 7395.64,6100.01 7411.01,6115.38 v1(7411.01,6115.69)
PG6: M30.2 U5.136 | length 407
  Top Layer w6: v1(7507.81,6408.21) M30.2@7507.81,6457.75
  Bottom Layer w6: U5.136@7494.06,6059.62 7494.06,6094.69 7490.17,6098.58 7490.17,6360.67 7507.81,6378.31 v1(7507.81,6408.21)
PG9: M33.2 U5.180 | length 137.2
  Top Layer w6: M33.2@7868.08,5479.05 7868.08,5510.48 7873.07,5515.47 v1(7919.85,5515.47)
  Bottom Layer w6: v1(7919.85,5515.47) 7920.39,5515.47 7933.05,5528.13 U5.180@7966.5,5528.13
PG10: M9.2 U5.181 | length 423.1
  Top Layer w6: M9.2@8195.06,5635.1 8197.09,5637.13 v1(8236.01,5637.13)
  Bottom Layer w6: U5.181@7967.16,5509.1 U5.181@7966.5,5508.44 8205.66,5508.44 8236.01,5538.79 v1(8236.01,5637.13)
PG11: M15.2 U5.182 | length 359.7
  Top Layer w6: v1(8225.87,5470.94) 8225.87,5394.1 8227.84,5392.13 M15.2@8227.84,5381.1
  Bottom Layer w6: U5.182@7966.5,5488.76 8212.03,5488.76 8225.87,5474.92 v1(8225.87,5470.94)
PG12: M28.2 U5.183 | length 554
  Top Layer w6: v1(8261.3,5435.51) 8261.3,5273.77 8294.86,5240.2 M28.2@8294.86,5204.12
  Bottom Layer w6: U5.183@7966.5,5469.07 8187.69,5469.07 8220.73,5436.02 8260.79,5436.02 v1(8261.3,5435.51)
PG13: M29.2 U5.184 | length 455.5
  Top Layer w6: v1(8157.48,5436.02) 8157.48,5315.32 8222.85,5249.95 M29.2@8222.85,5204.12
  Bottom Layer w6: U5.184@7966.5,5449.39 8144.12,5449.39 v1(8157.48,5436.02)
PG14: M37.2 U5.185 | length 192.4
  Top Layer w6: M37.2@8112.16,5379.09 8114.17,5381.1 v1(8114.17,5418.31)
  Bottom Layer w6: U5.185@7966.5,5429.7 8102.78,5429.7 v1(8114.17,5418.31)
PH1: M8.2 U5.36 | length 1527.4
  Top Layer w6: v1(6061.38,4532.73) M8.2@6061.38,4565.37
  Bottom Layer w6: v1(6061.38,4532.73) 6063.54,4532.73 6073.9,4543.09 7195.27,4543.09 7198.79,4546.61 U5.36@7198.79,4898.21
PH6: M11.2 U5.92 | length 854.6
  Top Layer w6: M11.2@5965.03,5724.98 5965.09,5724.92 v1(6042.06,5724.92)
  Bottom Layer w6: v1(6042.06,5724.92) 6061.8,5744.66 6425.72,5744.66 6433.41,5752.35 6686.53,5752.35 6694.22,5744.66 U5.92@6805.08,5744.66
PH7: M10.2 U5.93 | length 871.3
  Top Layer w6: M10.2@5965.03,5796.78 6019.43,5796.78 6021.99,5794.22 6021.99,5764.56 v1(6021.78,5764.35)
  Bottom Layer w6: v1(6021.78,5764.35) U5.93@6805.08,5764.35
PHONES_L: C19.2 J3UI.A15 P0.1 R17.1 | length 5348
  Top Layer w10: v1(2073.83,6446.37) 2076.04,6446.37 2086.69,6457.01 2445.2,6457.01 2462.6,6474.41 v1(2631.89,6474.41)
  Bottom Layer w10: P0.1@2002.16,2936.03 2003.94,2937.81 2003.94,3020.72 2011.05,3027.83 2321.65,3027.83 2338.58,3044.76 2338.58,3239.05 2401.57,3302.04 2626.97,3302.04 ; J3UI.A15@2073.03,6509.84 2073.73,6509.14 2073.59,6508.99 2073.83,6508.75 v1(2073.83,6446.37) ; v1(2631.89,6474.41) 2669.34,6474.41 2675.2,6468.55 2675.2,6395.53 2681.05,6389.67 2825.6,6389.67 2857.06,6358.21 2857.06,3329.68 2829.43,3302.04 2626.97,3302.04 ; C19.2@2760.83,3246.5 R17.1@2626.97,3246.5 2626.97,3302.04
PHONES_R: C20.2 J3UI.A13 R18.2 | length 4799.3
  Top Layer w10: v1(1973.92,6446.95) 1973.92,6404.01 1979.77,6398.16 2349.93,6398.16 2388.77,6359.32 2405.54,6359.32 ccw(c2410.04,6401.57) 2414.54,6359.32 2431.3,6359.32 2452.99,6381.01 v1(2568.97,6381.01)
  Bottom Layer w10: J3UI.A13@1973.03,6509.84 1973.92,6508.96 v1(1973.92,6446.95) ; R18.2@2104.33,3243.54 2106.17,3245.38 C20.2@2246.06,3245.38 2322.29,3245.38 2397.99,3321.09 2821.86,3321.09 2841.06,3340.29 2841.06,6348.45 2815.84,6373.67 2621.04,6373.67 2613.71,6381.01 v1(2568.97,6381.01)
PI8: M5.2 U5.9 | length 736.9
  Top Layer w6: v1(8169.58,4781.84) 8169.58,4617.35 M5.2@8170.21,4616.71
  Bottom Layer w6: U5.9@7730.28,4898.21 7730.28,4930.83 7742.95,4943.5 7904.12,4943.5 8008.69,4838.93 8159.28,4838.93 8169.58,4828.64 v1(8169.58,4781.84)
PI11: M36.2 U5.15 | length 833.7
  Top Layer w6: M36.2@8141.61,4937.29 8170.7,4937.29 8183.2,4924.79 v1(8183.2,4909.79)
  Bottom Layer w6: U5.15@7612.17,4898.21 7611.52,4898.86 7611.52,4968.43 7603.86,4976.08 7603.86,4997.64 7624.19,5017.97 7670.79,5017.97 7721.26,4967.5 7914.89,4967.5 8016.61,4865.77 8139.18,4865.77 v1(8183.2,4909.79)
PI15: M7.2 U5.66 | length 126.5
  Top Layer w6: v1(6729.65,5226.78) 6731.58,5224.85 M7.2@6731.58,5179.66
  Bottom Layer w6: v1(6729.65,5226.78) 6734.62,5226.78 6735.36,5226.04 6742.16,5232.85 U5.66@6805.08,5232.85
POWER_BUTTON: C29.2 D9.1 M15.1 TS1.c | length 5153.4
  Top Layer w6: M15.1@8227.84,5313.6 8227.84,5272.22 8256.55,5243.51 8256.55,5041.5 8264.05,5034 8264.05,5018.82 8330.57,4952.3 v1(8346.91,4952.3) ; v1(8514.83,3654.09) 8514.83,3833.49 8522.87,3841.54 8654.08,3841.54 8669.81,3857.26 8669.81,4896.14 8634.45,4931.5 v1(8548.22,4931.5)
  Bottom Layer w6: D9.1@7882.49,1497.36 7882.49,1541.5 7888.5,1547.51 7950.75,1547.51 7979.1,1575.86 7979.1,3148.28 7982.62,3151.8 8633.11,3151.8 8636.62,3155.31 8636.62,3320.81 C29.2@8640.09,3324.28 8640.09,3638.05 8624.6,3653.54 TS1.c@8566.14,3653.54 8565.6,3654.09 v1(8514.83,3654.09) ; v1(8346.91,4952.3) 8527.42,4952.3 v1(8548.22,4931.5)
POWER_HOLD: D10.1 M6.1 | length 3863.1
  Top Layer w6: M6.1@8324.05,4800.2 8324.05,4775.77 8346.91,4752.91 8346.91,3660.59 8330.7,3644.39 v1(8330.7,3641.88)
  Bottom Layer w6: D10.1@7747.78,1497.36 7747.78,1551.72 7758.86,1562.8 7946.81,1562.8 7966.05,1582.04 7966.05,3152.2 7978.17,3164.32 8268.16,3164.32 8273.5,3169.66 8273.5,3623.28 8292.11,3641.88 v1(8330.7,3641.88)
PROG_HOLD: M3h.1 Q2.3 R39.1 U6.5 | length 9909.6
  Top Layer w6: M3h.1@8368.61,6546.25 8368.61,6600.85 8378.61,6610.85 8609.78,6610.85 v1(8610.81,6609.82) ; v1(8756.94,6406.27) 8756.94,6402.1 8748.59,6393.75 8748.59,5833.33 8777.94,5803.98 8777.94,5775.55 8760.47,5758.08 8760.47,5498.97 8800.97,5458.47 8800.97,3890.75 8823.41,3868.31 v1(8823.41,3831.44)
  Bottom Layer w6: Q2.3@5938.86,1256.37 6062.43,1256.37 6065.94,1259.89 6065.94,1423.23 ; R39.1@6065.94,1801.18 6065.94,1423.23 ; U6.5@6763.47,1717.52 6763.47,1539.93 6759.96,1536.42 ; v1(8610.81,6609.82) 8611.83,6610.85 8640.91,6610.85 8648.45,6618.38 8735.52,6618.38 8739.03,6614.86 8739.03,6424.17 v1(8756.94,6406.27) ; v1(8823.41,3831.44) 8823.41,3829.6 8812.74,3818.93 8812.74,3370.18 8801.65,3359.09 8718.27,3359.09 8714.76,3355.58 8714.76,3287.8 8704.21,3277.26 8668.09,3277.26 8662.54,3271.71 8662.54,3131.31 8659.03,3127.8 8006.62,3127.8 8003.1,3124.28 8003.1,1423.81 7999.59,1420.29 7604.39,1420.29 7600.88,1416.78 7600.88,1298.09 7597.37,1294.58 7515.59,1294.58 7512.07,1291.06 7512.07,1206.96 7500.98,1195.87 7122.67,1195.87 7119.15,1199.38 7119.15,1374.31 7110.67,1382.79 6984.81,1382.79 6981.3,1386.31 6981.3,1523.46 6968.35,1536.42 6759.96,1536.42 ; 6065.94,1423.23 6347.86,1423.23 6351.38,1426.74 6351.38,1532.9 6354.89,1536.42 6759.96,1536.42
PTT: J1UI.A17 J2UI.A2 M25.1 | length 3582.2
  Top Layer w6: v1(3573.78,6524.07) 3623.45,6474.41 5145.67,6474.41 5196.85,6423.23 v1(5203.74,6423.23) ; v1(5789.82,5929.43) 5789.82,5880.06 5800.1,5869.78 M25.1@5898.56,5869.78
  Bottom Layer w6: v1(3573.78,6524.07) 3573.78,6460.08 3580.71,6453.15 J2UI.A2@3579.53,6451.97 ; v1(5203.74,6423.23) 5189.63,6409.11 5189.63,6052.81 5294.27,5948.17 5789.82,5948.17 ; v1(5789.82,5929.43) 5789.82,5948.17 ; J1UI.A17@6291.04,6090.79 6291.04,5964.79 6274.41,5948.17 5789.82,5948.17
RFM_DIO0: M23.1 M51e.2 | length 4716.6
  Top Layer w6: v1(5378.94,1700.74) 5415.53,1737.33 5415.53,2798.57 5732.2,3115.23 5732.2,3596.53 5825.1,3689.43 5825.1,4404.82 5821.58,4408.34 5737.4,4408.34 5662.37,4483.37 5662.37,4682.79 5702.76,4723.18 5702.76,4962.19 5699.24,4965.7 5507.03,4965.7 5447.38,5025.35 5447.38,5117.05 5454.34,5124.02 M23.1@5507.26,5124.02
  Bottom Layer w6: M51e.2@5126.27,1329.96 5339.34,1329.96 5360.19,1350.82 5360.19,1624.26 5364.74,1628.81 5419.71,1628.81 5428.8,1637.89 5428.8,1697.22 5425.28,1700.74 v1(5378.94,1700.74)
RFM_DIO1: M22.1 M51c.2 | length 4428.1
  Top Layer w6: v1(5384.84,1607.81) 5384.84,1671.02 5429.01,1715.18 5429.01,2791.21 5744.2,3106.4 5744.2,3586.89 5840.1,3682.79 5840.1,4408.34 5828.1,4420.34 5742.37,4420.34 5674.37,4488.34 5674.37,4672.55 5714.76,4712.94 5714.76,4967.16 5698.99,4982.92 5521.36,4982.92 5480.76,5023.52 5480.76,5046.24 M22.1@5479.76,5047.24
  Bottom Layer w6: M51c.2@5272.41,1208.71 5302.21,1208.71 5307.4,1213.89 5307.4,1278.26 5372.19,1343.06 5372.19,1595.15 v1(5384.84,1607.81)
RFM_DIO2: M18.1 M51d.2 | length 4043.9
  Top Layer w6: v1(5407.8,1658.48) 5407.8,1675.48 5441.97,1709.65 5441.97,2787.2 5756.2,3101.43 5756.2,3581.92 5854.56,3680.29 5854.56,4412.02 5834.24,4432.34 5747.98,4432.34 5686.37,4493.95 5686.37,4667.58 5728.87,4710.08 M18.1@5728.87,5016.73
  Bottom Layer w6: M51d.2@5126.27,1557.09 5339.57,1557.09 5348.19,1565.71 5348.19,1632.74 5358.3,1642.85 5392.17,1642.85 v1(5407.8,1658.48)
RFM_MISO: M19.1 U10.16 | length 5022.7
  Top Layer w6: v1(5511.48,1643.61) 5511.48,1649.74 5494.28,1666.94 5494.28,2771.64 5804.2,3081.55 5804.2,3562.04 5912.53,3670.38 5912.53,4910.92 5900.53,4922.92 5857.85,4922.92 5847.85,4932.92 M19.1@5847.85,5001.97
  Bottom Layer w6: U10.16@4570.67,1219.49 4570.67,1122.96 4581.21,1112.41 5245.25,1112.41 5331.4,1198.56 5331.4,1268.32 5355.42,1292.34 5398.92,1335.84 5398.92,1556.99 5485.55,1643.61 v1(5511.48,1643.61)
RFM_MOSI: M20.1 U10.17 | length 5211.6
  Top Layer w6: v1(5493.94,1615.88) 5493.94,1623.57 5482.28,1635.22 5482.28,2776.61 5792.2,3086.52 5792.2,3567.01 5897.85,3672.67 5897.85,4900.92 5887.85,4910.92 5805.1,4910.92 5785.1,4930.92 M20.1@5785.1,5091.87
  Bottom Layer w6: U10.17@4520.67,1219.49 4520.67,1117.98 4538.24,1100.41 5250.22,1100.41 5343.4,1193.59 5343.4,1262.1 5410.92,1329.62 5410.92,1547.8 5477.62,1614.49 5492.55,1614.49 v1(5493.94,1615.88)
RFM_NSS: M21.1 U10.19 | length 4769.6
  Top Layer w6: v1(5469.28,1574.94) 5469.28,2780.57 5780.2,3091.49 5780.2,3571.98 5882.87,3674.66 5882.87,4417.65 5844.19,4456.34 5760.65,4456.34 5732.68,4484.31 5732.68,4522.78 M21.1@5731.68,4523.78
  Bottom Layer w6: U10.19@4420.67,1219.49 4420.67,1094.09 4426.86,1087.91 5254.69,1087.91 5355.42,1188.64 5355.42,1256.37 5422.92,1323.87 5422.92,1528.58 v1(5469.28,1574.94)
RFM_RST: M16.1 U10.12 | length 4484.2
  Top Layer w6: v1(5420.04,1607.81) 5420.04,1609.07 5456.28,1645.3 5456.28,2784.54 5768.2,3096.46 5768.2,3576.95 5868.11,3676.87 5868.11,4415.44 5839.22,4444.34 5755.68,4444.34 5701.37,4498.65 5701.37,4593.43 5732.98,4625.04 M16.1@5732.98,4655.51
  Bottom Layer w6: U10.12@4770.67,1219.49 4770.67,1130.33 4776.58,1124.41 5240.28,1124.41 5319.4,1203.53 5319.4,1273.29 5350.45,1304.34 5385.28,1339.17 5385.28,1574.31 5418.78,1607.81 v1(5420.04,1607.81)
RFM_SCK: M24.1 U10.18 | length 8530.9
  Top Layer w6: v1(5756.89,1262.8) 5782.48,1262.8 5813.33,1231.94 6621.28,1231.94 6629.72,1240.38 6629.72,2373.11 6927.55,2670.94 7184.58,2670.94 7200.89,2687.26 7200.89,2997.26 7179.1,3019.05 7179.1,3636.61 7191.84,3649.36 v1(7191.84,3653.57) ; M24.1@8037.52,5357.82 8037.52,5331.61 8055.1,5314.03 8055.1,4049.85 8092.17,4012.79 8092.17,3857.26 8112.42,3837.01 8177.44,3837.01 8180.96,3833.49 8180.96,3581.6 v1(8197.05,3565.51)
  Bottom Layer w6: U10.18@4470.67,1219.49 4470.67,1273.43 4456.69,1287.4 4401.57,1287.4 4388.78,1274.61 4388.78,1097.44 4411.2,1075.02 5753.38,1075.02 5756.89,1078.54 v1(5756.89,1262.8) ; v1(7191.84,3653.57) 7218.06,3653.57 7308.28,3563.34 8194.89,3563.34 v1(8197.05,3565.51)
RX_CLK_N: J2UI.A5 M55.1 | length 5753.5
  Top Layer w6: v1(1235.3,3423.4) 1235.3,3425.26 1269.3,3459.26 1269.3,6116.62 1393.83,6241.14 v1(1416.34,6241.14)
  Bottom Layer w6: M55.1@1083.77,3262.67 1083.77,3320.79 1087.29,3324.31 1136.21,3324.31 v1(1235.3,3423.4) ; v1(1416.34,6241.14) 1453.85,6241.14 1457.37,6244.66 1457.37,6626.39 1489.65,6658.68 3397.58,6658.68 3423.51,6632.76 3423.51,6452.28 J2UI.A5@3423.82,6451.97
RX_CLK_P: J2UI.A6 M56.1 | length 5627.7
  Top Layer w6: v1(1265.49,3422.99) 1281.3,3438.81 1281.3,6111.65 1385.21,6215.55 v1(1437.01,6215.55)
  Bottom Layer w6: M56.1@1169.12,3262.67 1169.12,3303.96 1265.49,3400.33 v1(1265.49,3422.99) ; v1(1437.01,6215.55) 1438.04,6214.52 1465.96,6214.52 1469.48,6218.04 1469.48,6621.53 1494.62,6646.68 3348.87,6646.68 3374.8,6620.76 3374.8,6452.95 J2UI.A6@3373.82,6451.97
RX_QSD_IN: J2UI.A10 J3UI.A20 | length 1015
  Bottom Layer w6: J3UI.A20@2323.03,6509.84 2323.03,6563.24 2326.55,6566.75 3163.93,6566.75 3174.78,6555.91 3174.78,6452.93 J2UI.A10@3173.82,6452.93
SAI1_FS_A: U1.43 U5.3 | length 4692.1
  Top Layer w6: v1(5004.27,4314.02) 5004.52,4313.77 5004.52,4096.82 v1(5004.77,4096.57)
  Bottom Layer w6: v1(5004.27,4314.02) 5006.71,4316.46 5211.54,4316.46 5233.02,4294.98 6636.61,4294.98 6772.48,4159.12 7068.52,4159.12 7275.95,3951.69 8028.02,3951.69 8114.53,4038.2 8114.53,4700.67 8114.53,4781.07 8096.95,4798.64 7900.05,4798.64 7848.39,4850.3 U5.3@7848.39,4898.21 ; v1(5004.77,4096.57) 5004.77,4058.45 5010.61,4052.61 U1.43@5010.61,4008.33
SAI1_FS_B: U1.39 U5.33 | length 3317.8
  Top Layer w6: v1(4930.31,4435.19) 4931.09,4434.42 4931.09,4126.72 v1(4931.87,4125.94)
  Bottom Layer w6: v1(4930.31,4435.19) 4931.37,4436.25 4977.45,4436.25 5030.68,4383.02 5234.68,4383.02 5262.72,4354.98 6319.4,4354.98 6337.24,4372.82 6337.24,4495.17 6347.79,4505.72 7247.09,4505.72 7265.53,4524.15 7265.53,4629.12 7257.84,4636.81 U5.33@7257.84,4898.21 ; v1(4931.87,4125.94) U1.39@4931.87,4008.33 U1.39@4933.26,4006.94
SAI1_MCLK_A: U1.44 U5.137 | length 5318
  Top Layer w6: v1(5030.3,4075.45) v1(5030.3,4269.69) ; v1(7515.06,6116.35) 7559.06,6072.36 7559.06,3939.62 7567.91,3930.76 v1(7567.91,3867.13)
  Bottom Layer w6: U1.44@5030.3,4008.33 v1(5030.3,4075.45) ; v1(5030.3,4269.69) 5030.3,4250.8 5050.04,4231.06 5206.88,4231.06 5222.36,4246.55 6613.57,4246.55 6749,4111.12 7044.6,4111.12 7254.78,3900.94 7483.54,3900.94 7517.35,3867.13 v1(7567.91,3867.13) ; U5.137@7513.75,6059.62 7514.4,6060.28 7514.4,6115.69 v1(7515.06,6116.35)
SAI1_SCK_A: U1.42 U5.4 | length 4725.8
  Top Layer w6: v1(4979.02,4113.82) v1(4979.02,4335.02)
  Bottom Layer w6: v1(4979.02,4113.82) 4978.81,4113.62 4978.81,4075.45 4990.93,4063.33 U1.42@4990.93,4008.33 ; v1(4979.02,4335.02) 5212.72,4335.02 5240.76,4306.98 6641.58,4306.98 6777.45,4171.12 7073.5,4171.12 7280.92,3963.69 8023.05,3963.69 8102.53,4043.17 8102.53,4705.64 8102.53,4776.09 8091.98,4786.64 7895.08,4786.64 7828.71,4853.02 U5.4@7828.71,4898.21
SAI1_SCK_B: U1.38 U5.32 | length 3342.6
  Top Layer w6: v1(4897.86,4109.3) v1(4897.86,4411.58)
  Bottom Layer w6: v1(4897.86,4109.3) 4912.19,4094.97 U1.38@4912.19,4008.33 ; v1(4897.86,4411.58) 4982.95,4411.58 5023.51,4371.02 5229.71,4371.02 5257.75,4342.98 6324.38,4342.98 6349.24,4367.85 6349.24,4490.2 6352.76,4493.72 7254.87,4493.72 7277.53,4516.38 U5.32@7277.53,4898.21
SAI1_SD_A: U1.41 U5.5 | length 4770.4
  Top Layer w6: v1(4958.02,4058.66) v1(4958.02,4364.42)
  Bottom Layer w6: v1(4958.02,4058.66) 4971.24,4045.44 U1.41@4971.24,4008.33 ; v1(4958.02,4364.42) 4982.24,4364.42 4999.64,4347.02 5219.77,4347.02 5247.8,4318.98 6646.55,4318.98 6782.42,4183.12 7078.47,4183.12 7285.89,3975.69 8018.08,3975.69 8090.53,4048.14 8090.53,4710.61 8090.53,4771.12 8087.01,4774.64 7884.47,4774.64 7809.02,4850.09 U5.5@7809.02,4898.21
SAI1_SD_B: U1.37 U5.2 | length 4825.5
  Top Layer w6: v1(4875.62,4293.25) 4875.62,4076.14 v1(4891.19,4060.57)
  Bottom Layer w6: v1(4875.62,4293.25) 4875.85,4293.02 5025.71,4293.02 5037.15,4304.46 5198.96,4304.46 5220.44,4282.98 6628.67,4282.98 6764.54,4147.12 7063.07,4147.12 7271.22,3938.98 8032.27,3938.98 8126.53,4033.23 8126.53,4695.7 8126.53,4786.04 8101.92,4810.64 7905.02,4810.64 7868.08,4847.59 U5.2@7868.08,4898.21 ; v1(4891.19,4060.57) 4891.84,4059.92 4891.84,4008.99 U1.37@4892.5,4008.33
SD_DET: J6.10 M40.1 R27.2 | length 1883.9
  Top Layer w6: M40.1@8123.86,5564.99 8123.86,5527.22 8127.38,5523.71 8237.53,5523.71 8307.57,5453.67 8307.57,5291.73 8354.03,5245.26 8354.03,5197.81 8400.49,5151.35 8400.49,5001.03 8420.3,4981.23 8420.3,4268.31 v1(8432.7,4255.91) ; v1(8499.02,4255.91) v1(8606.3,4255.91)
  Bottom Layer w6: v1(8432.7,4255.91) v1(8499.02,4255.91) ; v1(8606.3,4255.91) 8606.3,4286.97 8613.51,4294.18 8663.27,4294.18 J6.10@8663.39,4294.29 ; R27.2@8636.26,4187.99 8636.26,4217.78 8663.82,4245.34 J6.10@8663.82,4294.18
SD_POWER: C28.1 J6.4 R24.1 R25.1 R26.1 R27.1 R28.1 R29.1 U4.1 | length 1519.4
  Bottom Layer w12: J6.4@8261.81,4548.23 8262.1,4547.94 8542.61,4547.94 8573.82,4516.73 8573.82,4463.38 8573.82,4283.46 8546.26,4255.91 R27.1@8546.26,4187.99 R25.1@8432.7,4187.99 R29.1@8432.7,3938.9 ; R24.1@8432.7,3856.3 R29.1@8432.7,3938.9 ; U4.1@8518.73,4020.16 8518.73,3938.9 ; C28.1@8706.5,4001.75 8706.5,3954.26 8691.14,3938.9 8518.73,3938.9 ; R29.1@8432.7,3938.9 8518.73,3938.9
SD_PWR_CNTR: M9.1 U4.4 | length 2064.1
  Top Layer w6: M9.1@8195.06,5565.6 8195.06,5539.77 8198.68,5536.14 8242.07,5536.14 8319.88,5458.33 8319.88,5320.16 8323.4,5316.64 8687.43,5316.64 8690.94,5313.13 8690.94,4177.17 8705.05,4163.06 v1(8743.97,4163.06)
  Bottom Layer w6: U4.4@8625.03,4094.97 8625.03,4132.9 8630.91,4138.78 8725.39,4138.78 8732.04,4145.43 8732.04,4146.26 8743.97,4158.19 v1(8743.97,4163.06)
SDMMC1_CK: J6.5 U5.169 | length 1695.2
  Top Layer w6: v1(8247.84,4741.14) 8310.78,4678.2 v1(8310.78,4502.42) ; v1(8318.03,5036.71) 8318.03,5090.84 8323.24,5096.05 v1(8353.92,5096.05)
  Bottom Layer w6: U5.169@7966.5,5744.66 8229.94,5744.66 8344.81,5629.79 8344.81,5121.75 8354.14,5112.43 8354.14,5096.27 v1(8353.92,5096.05) ; v1(8247.84,4741.14) 8247.84,4781.45 8256.02,4789.63 8256.02,4974.7 v1(8318.03,5036.71) ; J6.5@8261.81,4504.92 8264.31,4502.42 v1(8310.78,4502.42)
SDMMC1_CMD: J6.3 R28.2 U5.172 | length 2814.4
  Top Layer w6: v1(8547.66,4972.68) 8550.34,4975.36 v1(8628.38,4975.36)
  Bottom Layer w6: U5.172@7966.5,5685.61 8010.62,5685.61 8054.23,5729.21 8228.42,5729.21 8332.81,5624.82 8332.81,5085.62 8362.9,5055.54 8362.9,5002.51 8389.81,4975.6 8392.73,4972.68 v1(8547.66,4972.68) ; R28.2@8344.03,4020.44 8192.65,4020.44 8187.69,4025.4 8187.69,4580.74 8198.64,4591.69 8261.65,4591.69 J6.3@8261.81,4591.54 8262.27,4592 8298.85,4592 8329.55,4622.7 8540.34,4622.7 8611.95,4694.31 8611.95,4958.93 v1(8628.38,4975.36)
SDMMC1_D0: J6.7 R26.2 U5.144 | length 3895.6
  Top Layer w6: v1(7592.45,3829.93) 7592.45,3936.13 7583.89,3944.69 7583.89,5009.47 7640.96,5066.53 7640.96,5762 v1(7624.86,5778.1)
  Bottom Layer w6: v1(7592.45,3829.93) 7592.91,3830.38 7618.37,3830.38 7625.1,3823.66 8377.9,3823.66 8381.42,3827.18 8381.42,4098.85 8377.9,4102.36 R26.2@8344,4102.36 8203.66,4102.36 8200.15,4105.88 8200.15,4414.41 8203.66,4417.92 8261.43,4417.92 J6.7@8261.81,4418.31 ; v1(7624.86,5778.1) 7624.86,5801.12 7651.54,5827.79 U5.144@7651.54,6059.62
SDMMC1_D1: J6.8 R25.2 U5.145 | length 3881.6
  Top Layer w6: v1(7614.88,3790.66) 7614.88,3930.67 7595.89,3949.66 7595.89,5004.49 7658.38,5066.98 v1(7658.38,5796.13)
  Bottom Layer w6: v1(7614.88,3790.66) 7614.88,3794.71 7631.83,3811.66 8389.9,3811.66 8393.42,3815.18 8393.42,4184.37 8389.79,4187.99 R25.2@8342.7,4187.99 8216.8,4187.99 8213.28,4191.51 8213.28,4371.64 8216.8,4375.16 8261.65,4375.16 J6.8@8261.81,4375 ; v1(7658.38,5796.13) 7658.38,5800.13 7671.23,5812.98 U5.145@7671.23,6059.62
SDMMC1_D2: J6.1 R24.2 U5.167 | length 3035.6
  Top Layer w6: v1(8548.22,5065.66) 8550.54,5063.34 8550.54,5039.79 v1(8577.65,5012.68)
  Bottom Layer w6: U5.167@7966.5,5784.03 8224.51,5784.03 8368.81,5639.73 8368.81,5146.97 8399.29,5116.5 8399.29,5053.5 8402.8,5049.99 8532.55,5049.99 v1(8548.22,5065.66) ; J6.1@8261.81,4678.15 8262.66,4677.3 8299.17,4677.3 8329.66,4646.81 8528.11,4646.81 8587.61,4706.31 8587.61,5000.17 8577.65,5010.14 v1(8577.65,5012.68) ; J6.1@8262.11,4678.45 8260.96,4677.3 8188.12,4677.3 8163.69,4652.86 8163.69,3866.32 8173.71,3856.3 R24.2@8342.7,3856.3
SDMMC1_D3: J6.2 R29.2 U5.168 | length 2884.2
  Bottom Layer w6: U5.168@7966.5,5764.35 8227.23,5764.35 8356.81,5634.76 8356.81,5140.32 8386.96,5110.18 8386.96,5048.86 8398.45,5037.37 8596.43,5037.37 8599.95,5033.86 8599.95,4700.63 8534.13,4634.81 J6.2@8261.81,4634.84 ; J6.2@8261.81,4634.84 8261.5,4634.53 8210.1,4634.53 8175.69,4600.12 8175.69,3947.05 8183.83,3938.9 R29.2@8342.7,3938.9
SPA_L: C2.2 R11.2 | length 894.8
  Top Layer w6: v1(3822.82,3302.17) v1(3822.82,3842.43)
  Bottom Layer w6: R11.2@3729.76,3301.18 3730.75,3302.17 v1(3822.82,3302.17) ; v1(3822.82,3842.43) 4079.4,3842.43 4081.24,3840.59 C2.2@4082.59,3841.94
SPA_R: C3.2 R12.2 | length 1255.9
  Top Layer w6: v1(3843.82,3220.67) v1(3843.82,4125.94)
  Bottom Layer w6: R12.2@3729.76,3222.44 3731.53,3220.67 v1(3843.82,3220.67) ; v1(3843.82,4125.94) C3.2@4079.64,4125.94